# Altium PCB PCB4.PcbDoc
Units mm, origin at the board's own origin, x right, y up, seen from the top; angles counter-clockwise.
Board outline 130 x 65 mm, 2 copper layers (Top Layer, Bottom Layer), stack 1.58 mm thick; 40 components, 33 nets, 174 pads, 17 vias.
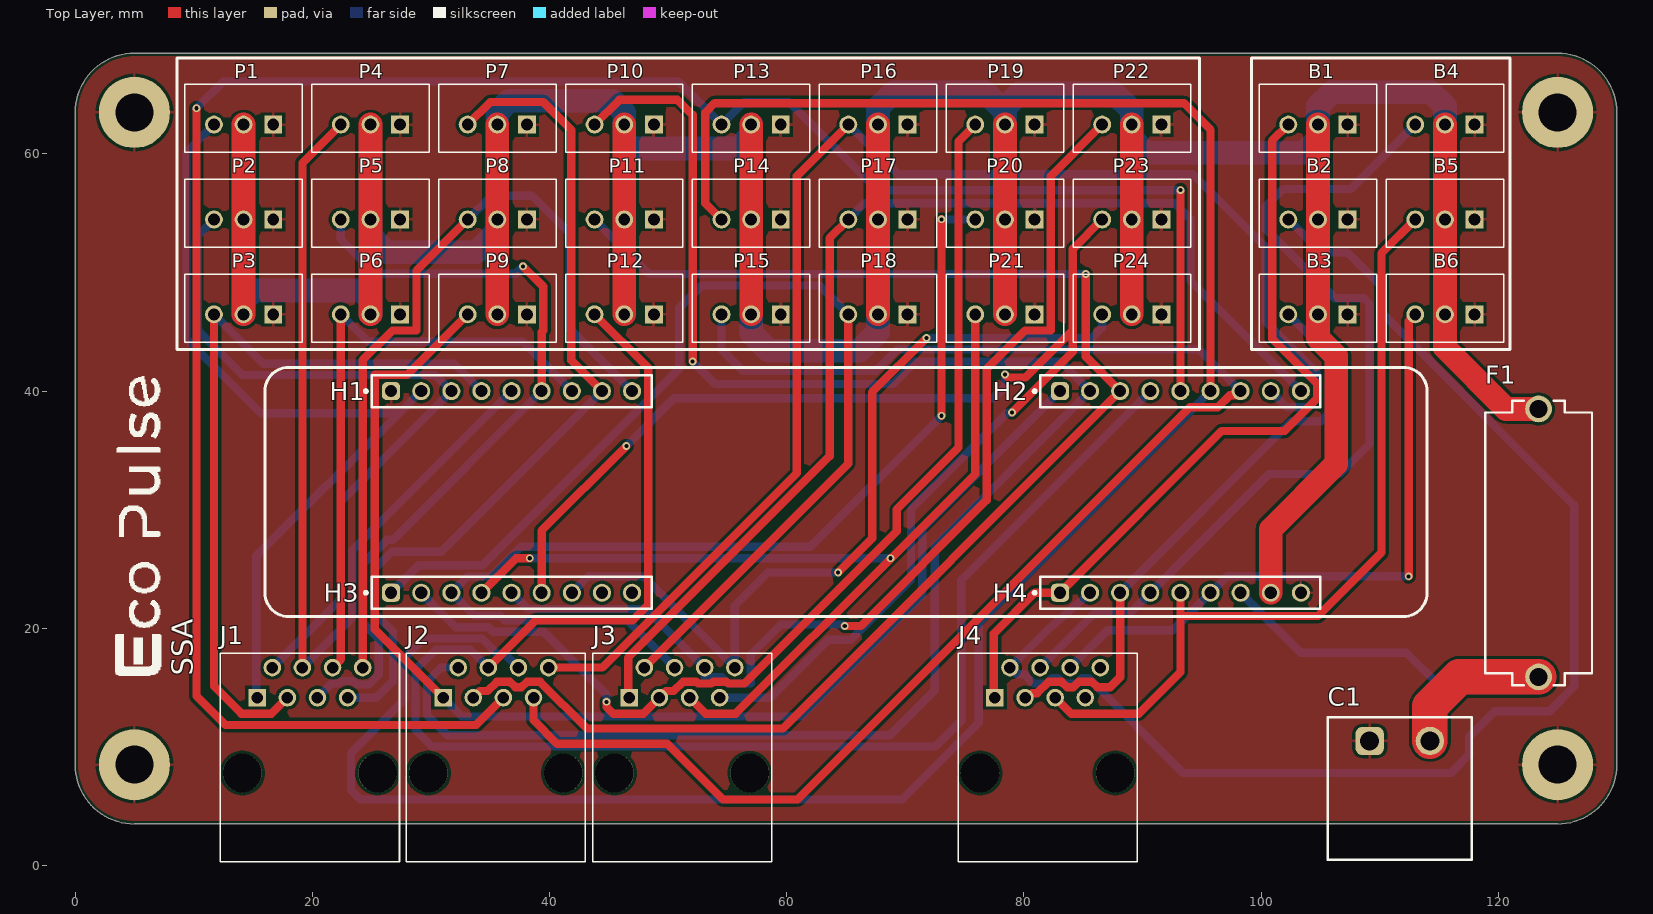
[diagram p0: Top Layer view]
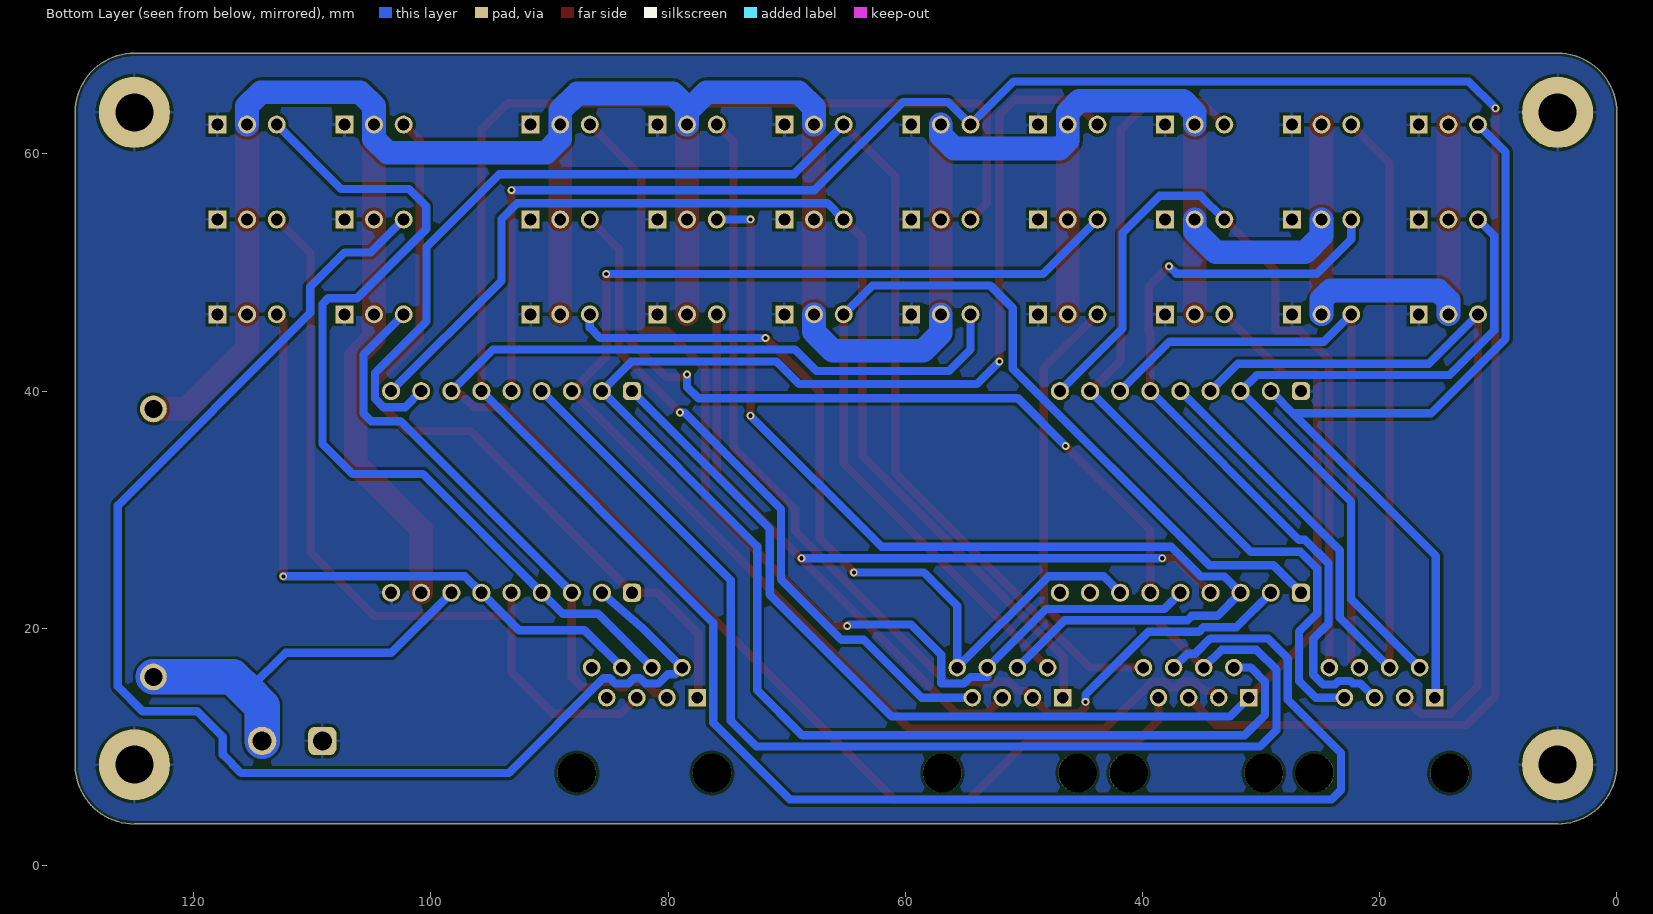
[diagram p1: Bottom Layer view, seen from below]
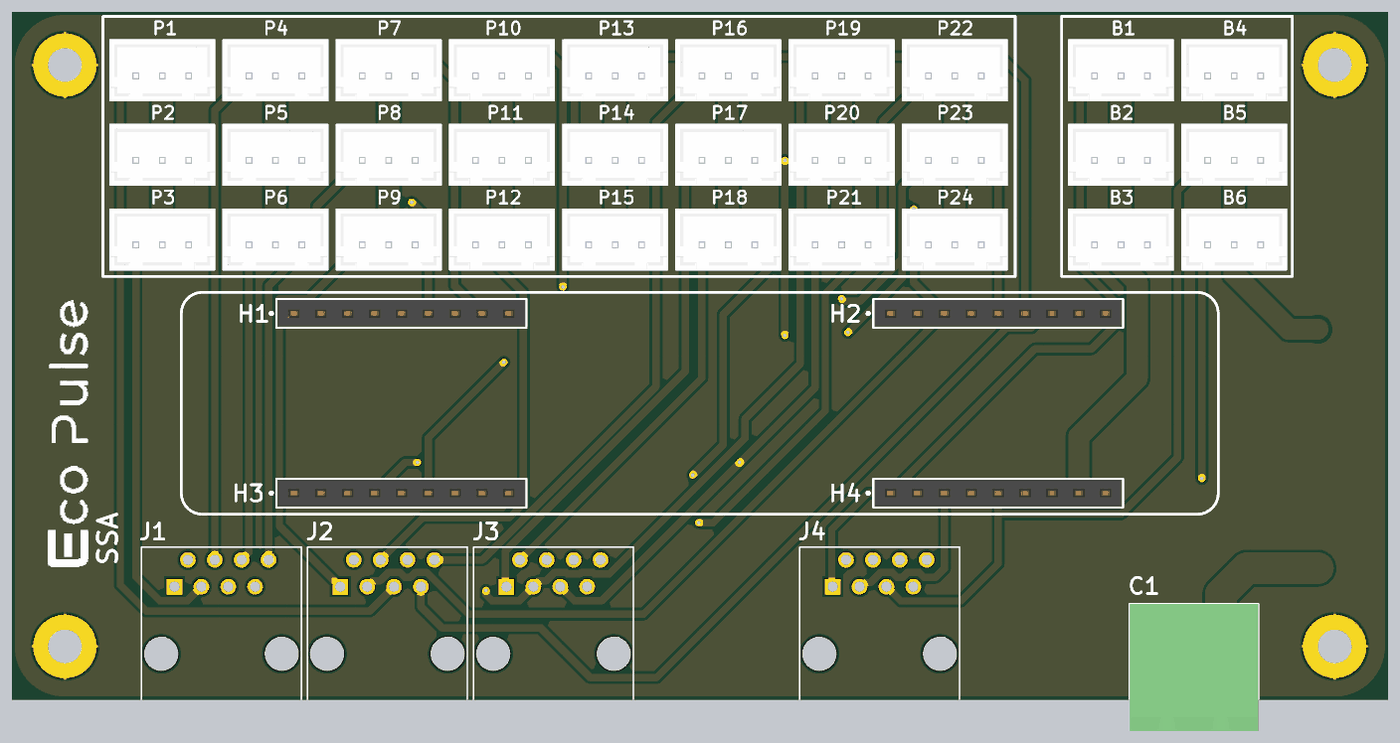
[diagram p2: 3D render of the assembled board from above, using the file's embedded part models]

## Layer stack, top to bottom
Top Solder: solder mask 0.0102, Solder Resist, Dk 3.5
Top Layer: signal copper 0.0356
Dielectric 1: dielectric 1.5086, FR-4, Dk 4.8
Bottom Layer: signal copper 0.0356
Bottom Solder: solder mask 0.0102, Solder Resist, Dk 3.5

## Board outline
5,3.5 cw(c5,8.5) 0,8.5 0,63.5 cw(c5,63.5) 5,68.5 125,68.5 cw(c125,63.5) 130,63.5 130,8.5 cw(c125,8.5) 125,3.5

## Design rules (kind name [scope] priority, off if disabled: settings)
BoardOutlineClearance [All] p1: gap=0.254 ignorepadtopadclearanceinfootprint=FALSE except(0: Arc-SplitContinuation Track-SplitContinuation SMDPad-SplitContinuation THPad-SplitContinuation Via-SplitContinuation Fill-SplitContinuation Poly-SplitContinuation Region-SplitContinuation Text-SplitContinuation)
Clearance [All] p1: gap=0.254 ignorepadtopadclearanceinfootprint=FALSE
ComponentClearance [All] p1: gap=0.01 collisioncheckmode=3 verticalgap=0.01 showdistances=FALSE
HoleSize [All] p1: absolutevalues=TRUE maxlimit=4 minlimit=0.025 maxpercent=80.000 minpercent=20.000
PolygonConnect [All] p1: connectstyle=Relief reliefconductorwidth=0.254 reliefentries=4 polygonreliefangle="90 Angle" airgapwidth=0.254
RoutingLayers RoutingLayers_1 [InNet('GND')] p1: top layer_v5=FALSE bottom layer_v5=FALSE
RoutingLayers [All] p2: top layer_v5=TRUE bottom layer_v5=TRUE
RoutingVias [All] p1: holewidth=0.35 width=0.65 viastyle="Through Hole" minholewidth=0.31 minwidth=0.55 maxholewidth=0.4 maxwidth=0.7
SilkToSilkClearance [All] p1: silktosilkclearance=0.01
SilkToSolderMaskClearance [IsPad] p1: minsilkscreentomaskgap=0.1 clearancetoexposedcopper=TRUE
SolderMaskExpansion [All] p1: expansion=0.102 istentingtop=FALSE
SupplyNets "Schematic Supply Nets_1" [InNet('VCC')] p1: voltage=0.000
SupplyNets "Schematic Supply Nets" [InNet('GND')] p2: voltage=0.000
Width Width_1 [InNet('VCC')] p1: maxlimit=3 minlimit=1.5 preferedwidth=2 minimp=50.000000 maximp=50.000000 favimp=50.000000
Width [All] p2: maxlimit=3 minlimit=0.5 preferedwidth=0.7 minimp=50.000000 maximp=50.000000 favimp=50.000000
25 further rules are at their usual default settings.

## Classes and differential pairs
component class Sheet3: C1 F1 H1 H2 H3 H4
component class Sheet2: B1 B2 B3 B4 B5 B6 J1 J2 J3 J4 P1 P2 P3 P4 P5 P6 P7 P8 P9 P10 P11 P12 P13 P14 P15 P16 P17 P18 P19 P20 P21 P22 P23 P24

## Components (designator, comment, footprint, x,y, rotation, side; value= is the part's Value field where it differs from the comment)
B1 "B3B-XH-A" JST_B3B-XH-A 104.8,63 r0 top
B2 "B3B-XH-A" JST_B3B-XH-A 104.8,55 r0 top
B3 "B3B-XH-A" JST_B3B-XH-A 104.8,47 r0 top
B4 "B3B-XH-A" JST_B3B-XH-A 115.5,63 r0 top
B5 "B3B-XH-A" JST_B3B-XH-A 115.5,55 r0 top
B6 "B3B-XH-A" JST_B3B-XH-A 115.5,47 r0 top
C1 "691313510002" 691313510002 111.7,6.5 r0 top
F1 "696101000002" 696101000002 -1146.6,1297.2 r90 top
H1 "61300911821" 61300911821 36.8,40 r0 top
H2 "61300911821" 61300911821 93.2,40 r0 top
H3 "61300911821" 61300911821 36.8,23 r0 top
H4 "61300911821" 61300911821 93.2,23 r0 top
J1 "SS-7188-NF-K1" BEL_SS-7188-NF-K1 19.8,7.8 r0 top
J2 "SS-7188-NF-K1" BEL_SS-7188-NF-K1 35.475,7.8 r0 top
J3 "SS-7188-NF-K1" BEL_SS-7188-NF-K1 51.175,7.8 r0 top
J4 "SS-7188-NF-K1" BEL_SS-7188-NF-K1 82,7.8 r0 top
P1 "B3B-XH-A" JST_B3B-XH-A 14.2,63 r0 top
P2 "B3B-XH-A" JST_B3B-XH-A 14.2,55 r0 top
P3 "B3B-XH-A" JST_B3B-XH-A 14.2,47 r0 top
P4 "B3B-XH-A" JST_B3B-XH-A 24.9,63 r0 top
P5 "B3B-XH-A" JST_B3B-XH-A 24.9,55 r0 top
P6 "B3B-XH-A" JST_B3B-XH-A 24.9,47 r0 top
P7 "B3B-XH-A" JST_B3B-XH-A 35.6,63 r0 top
P8 "B3B-XH-A" JST_B3B-XH-A 35.6,55 r0 top
P9 "B3B-XH-A" JST_B3B-XH-A 35.6,47 r0 top
P10 "B3B-XH-A" JST_B3B-XH-A 46.3,63 r0 top
P11 "B3B-XH-A" JST_B3B-XH-A 46.3,55 r0 top
P12 "B3B-XH-A" JST_B3B-XH-A 46.3,47 r0 top
P13 "B3B-XH-A" JST_B3B-XH-A 57,63 r0 top
P14 "B3B-XH-A" JST_B3B-XH-A 57,55 r0 top
P15 "B3B-XH-A" JST_B3B-XH-A 57,47 r0 top
P16 "B3B-XH-A" JST_B3B-XH-A 67.7,63 r0 top
P17 "B3B-XH-A" JST_B3B-XH-A 67.7,55 r0 top
P18 "B3B-XH-A" JST_B3B-XH-A 67.7,47 r0 top
P19 "B3B-XH-A" JST_B3B-XH-A 78.4,63 r0 top
P20 "B3B-XH-A" JST_B3B-XH-A 78.4,55 r0 top
P21 "B3B-XH-A" JST_B3B-XH-A 78.4,47 r0 top
P22 "B3B-XH-A" JST_B3B-XH-A 89.1,63 r0 top
P23 "B3B-XH-A" JST_B3B-XH-A 89.1,55 r0 top
P24 "B3B-XH-A" JST_B3B-XH-A 89.1,47 r0 top

## Footprints (in the part's own frame and the unit in brackets; to place one, negate y for a bottom-side part, rotate by r counter-clockwise, add the part's x,y. Pads: shape width x height; smd on the part's side, far side on the other; paste and mask are expansions set on the pad)
61300911821 [mm] "Socket Header, Pitch 2.54 mm, THT, Vertical, single row, 9p"
  rrect50% 1.52x1.52 hole 1.02: 1(-10.16,0)
  round 1.52 hole 1.02: 2(-7.62,0) 3(-5.08,0) 4(-2.54,0) 5(0,0) 6(2.54,0) 7(5.08,0) 8(7.62,0) 9(10.16,0)
  silkscreen extent -12.41,-1.35 11.8,1.35, body extent -11.68,-1.25 11.68,1.25, height 8.55
691313510002 [mm] "5,08mm - PCB Headers - Horizontal - Closed ends - 02p"
  rrect50% 2.4x2.4 hole 1.6: 1(-2.54,4)
  round 2.4 hole 1.6: 2(2.54,4)
  silkscreen extent -6.08,-6 6.08,6, body extent -6.08,-6 6.08,6, height 8.55
696101000002 [mm] "FUSEHOLDER BLOCKS - PCB - CLIP COVER - THT"
  round 2.25 hole 1.5: 1(-1281.3,-1270) 2(-1258.7,-1270)
  silkscreen extent -1282,-1274.5 -1258,-1265.5, body extent -1282,-1274.5 -1258,-1265.5, height 13.55
BEL_SS-7188-NF-K1 [mm]
  rect 1.478x1.478 hole 0.97: 1(-4.445,6.35)
  round 1.478 hole 0.97: 2(-3.175,8.89) 3(-1.905,6.35) 4(-0.635,8.89) 5(0.635,6.35) 6(1.905,8.89) 7(3.175,6.35) 8(4.445,8.89)
  round 3.25 hole 3.25 unplated: ""(-5.7,0) ""(5.7,0)
  silkscreen extent -7.55,-7.5 7.55,10.1
JST_B3B-XH-A [mm]
  rect 1.508x1.508 / inner round 1.508 / far side rect 1.508x1.508 hole 1: 1(2.5,-0.525)
  round 1.508 hole 1: 2(0,-0.525) 3(-2.5,-0.525)
  silkscreen extent -4.95,-2.88 4.95,2.88, body extent -4.95,-2.88 4.95,2.88, height 7

## Part data
B1 B2 B3 B4 B5 B6 P1 P2 P3 P4 P5 P6 P7 P8 P9 P10 P11 P12 P13 P14 P15 P16 P17 P18 P19 P20 P21 P22 P23 P24: "Connector Header Through Hole 3 position 0.098 (2.50mm)", Package=None, Check_prices=https://www.snapeda.com/parts/B3B-XH-A/JST+Sales+America+Inc./view-part/?ref=eda, MF="JST Sales", MP=B3B-XH-A, SnapEDA_Link=https://www.snapeda.com/parts/B3B-XH-A/JST+Sales+America+Inc./view-part/?ref=snap
C1: library part CMP-1502-02192-3, "313; 5.08MM Pitch Straight Pluggable Term Block, Pcb Header, Through Hole, 2 Way", Color=Green, Current=20A, Max Operating Temperature=105°C, Min Operating Temperature=-40°C, Voltage=300V, Contact Material=Tin, Contact Plating=Tin, Current Rating=20A, Gender=Male, Height=8.7mm, Lead Pitch=5.08mm, Length=11.5mm, Mount="Through Hole", Number of Contacts=2, Number of Levels=1, Number of Pins=2, Number of Positions Per Level=2, Number of Rows=1, Packaging=Box, Pitch=5.08mm, RoHS=Compliant, Termination=Solder, Voltage Rating=300V, Width=12.16mm
F1: library part CMP-1502-00233-4, "WR-FSH Fuse Holder Blocks Fuse Holder Blocks Clip Cover for PCB", Fuse Current=10A, Max Operating Temperature=120°C, Min Operating Temperature=-30°C, Voltage Rating (AC)=250V, Height=13.6mm, Mount="Through Hole", Packaging=Box, REACH SVHC=Unknown, RoHS=Compliant
H1 H2 H3 H4: library part CMP-1502-01331-4, "THT Vertical Socket Header WR-PHD, Pitch 2.54 mm, Single Row, 9 pins", Contact Resistance=20mΩ, Current Rating=3A, Operating Supply Voltage=250V, Gender=Female, Lead Pitch=2.54mm, Number of Pins=9, Orientation=Vertical
J1 J2 J3 J4: "Conn Modular Jack F 8 POS 2.54mm Solder RA Thru-Hole 8 Terminal 1 Port Cat 5", Package=None, Availability=Unavailable, MP=SS-7188-NF-K1, Price=None

## Free pads (board coordinates)
  round 6 hole 3.2: 2(5,8.5) 2(5,63.5) 2(125,8.5) 2(125,63.5)

## Via types
v1: diameter 0.65, hole 0.35, Top Layer to Bottom Layer, 17 vias

## Nets (pads, with @x,y where several pads share a name; then routed paths per layer and width w, separated by ;. In a path a pad name is that pad's centre, name@x,y a point inside that pad or via, vN(x,y) a via of type N, cw(c..) or ccw(c..) an arc to the next point about the centre after c; other vN are vias at no path point)
GND: B1.1 B2.1 B3.1 B4.1 B5.1 B6.1 C1.1 H1.1 H4.9 P1.1 P2.1 P3.1 P4.1 P5.1 P6.1 P7.1 P8.1 P9.1 P10.1 P11.1 P12.1 P13.1 P14.1 P15.1 P16.1 P17.1 P18.1 P19.1 P20.1 P21.1 P22.1 P23.1 P24.1 pad.2
NetB1_3: B1.3 H4.1 J4.1 | length 66.1
  Top Layer w0.7: J4.1 77.47,14.235 77.47,19.562 80.908,23 H4.1 96.68,36.64 101.994,36.64 104.724,39.37 104.724,40.64 100.94,44.424 100.94,61.115 B1.3
NetB2_3: B2.3 H4.2 J4.2 | length 115.8
  Bottom Layer w0.7: H4.2 82.117,19.982 J4.2 79.386,16.129 80.027,16.129 80.809,15.347 81.921,15.347 82.374,15.8 82.896,15.8 83.349,15.347 84.461,15.347 84.914,15.8 85.436,15.8 93.436,7.8 116,7.8 117.55,9.35 117.55,10.85 119.7,13 124.3,13 126.4,15.1 126.4,30.375 110.182,46.593 110.182,48.787 107.273,51.695 105.08,51.695 B2.3
NetB3_3: B3.3 H4.3 J4.3 | length 50.2
  Top Layer w0.7: J4.3 80.306,14.15 80.693,14.537 81.123,14.537 82.079,15.493 83.191,15.493 83.644,15.04 84.166,15.04 84.619,15.493 85.731,15.493 86.187,15.037 87.282,15.037 88.12,15.875 H4.3
  Bottom Layer w0.7: H4.3 102.585,37.465 105.054,37.465 105.689,38.1 105.689,43.086 B3.3
NetB4_3: B4.3 H4.4 J4.4 | length 76.1
  Bottom Layer w0.7: J4.4 85.909,21.234 88.894,21.234 H4.4 100.68,33.02 106.604,33.02 109.144,35.56 109.144,47.35 108.661,47.833 106.218,47.833 100.4,53.651 100.4,55.6 101.848,57.048 107.573,57.048 B4.3
NetB5_3: B5.3 H4.5 J4.5 | length 67.7
  Top Layer w0.7: J4.5 83.983,12.802 89.687,12.802 93.2,16.314 93.2,21.031 ; H4.5 93.2,21.031 ; B5.3 110.16,51.635 110.16,26.391 104.8,21.031 93.2,21.031
NetB6_3: B6.3 H4.6 J4.6 | length 54
  Top Layer w0.7: v1(112.446,24.384) 112.446,45.921 B6.3
  Bottom Layer w0.7: J4.6 87.052,19.837 92.577,19.837 H4.6 97.124,24.384 v1(112.446,24.384)
NetC1_2: C1.2 F1.1 H4.7 | length 46.5
  Top Layer w3: C1.2 114.24,13.44 116.7,15.9 F1.1
  Bottom Layer w0.7: H4.7 103.348,17.932 112.268,17.932 115.2,15
  Bottom Layer w3: C1.2 114.24,13.44 115.5,14.7 116.7,15.9 F1.1
NetH1_2: H1.2 J1.1 P1.3 | length 71.2
  Bottom Layer w0.7: P1.3 9.388,60.163 9.388,44.412 15.675,38.125 27.305,38.125 ; J1.1 15.265,14.15 15.265,26.085 27.305,38.125 ; H1.2 27.305,38.125
NetH1_3: H1.3 J1.2 P2.3 | length 63
  Bottom Layer w0.7: P2.3 10.342,53.117 10.342,45.117 14.095,41.364 30.356,41.364 H1.3 22.411,30.691 22.411,22.476 J1.2
NetH1_4: H1.4 J1.3 P3.3 | length 64.3
  Top Layer w0.7: P3.3 11.7,15.119 14.012,12.807 16.552,12.807 J1.3
  Bottom Layer w0.7: P3.3 15.857,42.318 31.942,42.318 H1.4
NetH1_5: H1.5 J1.4 P4.3 | length 77.7
  Top Layer w0.7: J1.4 19.165,59.24 P4.3
  Bottom Layer w0.7: J1.4 23.365,20.89 23.365,26.565 H1.5
NetH1_6: H1.6 J1.5 P5.3 | length 67
  Top Layer w0.7: v1(37.77,50.521) 39.472,48.819 39.472,45.11 39.34,44.979 H1.6
  Bottom Layer w0.7: J1.5 21.627,15.342 22.256,15.342 22.479,15.565 23.459,15.565 23.759,15.265 24.765,15.265 25.603,16.104 25.603,19.101 24.319,20.385 24.319,25.487 26.289,27.457 26.797,27.457 H1.6 ; P5.3 22.4,52.8 25.3,49.9 37.149,49.9 v1(37.77,50.521)
NetH1_7: H1.7 J1.6 P6.3 | length 52.2
  Top Layer w0.7: J1.6 22.4,17.385 P6.3
  Bottom Layer w0.7: P6.3 24.704,44.171 37.709,44.171 H1.7
NetH1_8: H1.8 J1.7 P7.3 | length 73.5
  Top Layer w0.7: P7.3 35.014,64.389 39.472,64.389 41.834,62.027 41.834,42.586 H1.8
  Bottom Layer w0.7: J1.7 25.4,14.15 26.794,15.544 26.794,19.739 25.273,21.26 25.273,25.048 26.67,26.445 30.865,26.445 H1.8
NetH1_9: H1.9 J1.8 P8.3 | length 68.9
  Top Layer w0.7: J1.8 24.245,42.609 26.753,45.117 28.778,45.117 28.778,50.153 P8.3
  Bottom Layer w0.7: P8.3 35.089,56.464 38.557,56.464 41.681,53.34 41.681,45.279 H1.9
NetH2_1: H2.1 J2.1 P9.3 | length 106.8
  Top Layer w0.7: J2.1 25.273,19.907 25.273,41.377 28.002,41.377 P9.3
  Bottom Layer w0.7: J2.1 32.607,12.573 61.145,12.573 71.439,22.867 71.439,28.399 H2.1
NetH2_2: H2.2 J2.2 P10.3 | length 148.2
  Top Layer w0.7: P10.3 45.892,64.567 50.8,64.567 52.07,63.297 v1(52.07,42.494)
  Bottom Layer w0.7: J2.2 30.863,16.69 29.667,15.494 29.667,12.7 31.384,10.983 68.692,10.983 72.492,14.783 72.492,26.912 H2.2 83.086,42.494 70.86,42.494 68.966,40.6 53.964,40.6 v1(52.07,42.494)
NetH2_3: H2.3 J2.3 P11.3 | length 123.3
  Top Layer w0.7: J2.3 34.127,14.707 34.767,14.707 35.554,15.493 36.666,15.493 37.119,15.04 37.641,15.04 38.094,15.493 39.206,15.493 43.142,11.557 59.677,11.557 H2.3 85.217,42.903 v1(85.217,49.886)
  Bottom Layer w0.7: P11.3 48.389,49.886 v1(85.217,49.886)
NetH2_4: H2.4 J2.4 P12.3 | length 136.5
  Top Layer w0.7: J2.4 38.829,20.679 46.99,20.679 48.336,22.025 48.336,41.939 P12.3
  Bottom Layer w0.7: J2.4 33.344,18.186 30.378,18.186 28.702,16.51 28.702,11.43 30.103,10.029 72.538,10.029 74.727,12.217 74.727,24.067 H2.4
NetH2_5: H2.5 J2.5 P13.3 | length 183.6
  Top Layer w0.7: v1(10.236,63.856) 10.236,14.29 12.673,11.853 33.813,11.853 J2.5 ; H2.5 v1(93.2,56.947)
  Bottom Layer w0.7: v1(10.236,63.856) 12.497,66.116 50.859,66.116 P13.3 56.414,64.389 60.198,64.389 67.64,56.947 v1(93.2,56.947)
NetH2_6: H2.6 J2.6 P14.3 | length 191.8
  Top Layer w0.7: P14.3 53.137,55.838 53.137,63.5 53.924,64.287 93.497,64.287 95.74,62.045 H2.6
  Bottom Layer w0.7: J2.6 36.214,17.856 35.574,17.856 34.29,19.14 29.413,19.14 27.748,17.475 27.748,13.97 23.266,9.488 23.266,6.35 24.054,5.563 69.723,5.563 76.2,12.04 76.2,20.46 H2.6
NetH2_7: H2.7 J2.7 P15.3 | length 128.3
  Top Layer w0.7: J2.7 38.65,12.252 40.64,10.262 49.936,10.262 54.635,5.563 60.909,5.563 93.98,38.633 96.342,38.633 97.358,39.649 97.929,39.649 H2.7
  Bottom Layer w0.7: P15.3 54.5,43.5 56.3,41.7 67.506,41.7 69.317,43.51 94.77,43.51 H2.7
NetH2_8: H2.8 J2.8 P16.3 | length 117.7
  Top Layer w0.7: J2.8 44.452,16.69 60.858,33.096 60.858,58.133 P16.3
  Bottom Layer w0.7: P16.3 69.375,58.3 94.227,58.3 100.381,52.146 100.381,45.866 104.724,41.522 104.724,39.37 103.988,38.633 102.187,38.633 H2.8
NetH2_9: H2.9 J3.1 P17.3 | length 96.5
  Top Layer w0.7: J3.1 46.634,14.15 46.634,17.523 63.627,34.516 63.627,52.902 P17.3
  Bottom Layer w0.7: P17.3 66.58,55.855 92.71,55.855 94.056,54.508 94.056,49.304 H2.9
NetH3_1: H3.1 J3.2 P18.3 | length 90.2
  Top Layer w0.7: J3.2 65.2,33.89 P18.3
  Bottom Layer w0.7: H3.1 28.958,25.318 34.36,25.318 50.927,41.885 50.927,46.99 52.837,48.9 62.775,48.9 P18.3
NetH3_2: H3.2 J3.3 P19.3 | length 88.6
  Top Layer w0.7: v1(44.8,13.8) 44.8,13.371 45.364,12.807 47.927,12.807 J3.3 49.827,14.707 50.467,14.707 51.254,15.493 52.378,15.493 52.524,15.347 53.648,15.347 53.794,15.493 54.918,15.493 55.064,15.347 56.447,15.347 69.274,28.174 69.274,30.023 74.491,35.24 74.491,61.066 P19.3
  Bottom Layer w0.7: H3.2 32.086,20.094 34.868,20.094 35.252,19.71 39.497,19.71 44.8,14.407 v1(44.8,13.8)
NetH3_3: H3.3 J3.4 P20.3 | length 88.4
  Top Layer w0.7: v1(73.05,37.922) v1(73.05,54.483)
  Bottom Layer w0.7: J3.4 46.548,20.682 36.206,20.682 35.839,21.048 33.672,21.048 H3.3 33.084,24.364 35.067,24.364 37.585,26.882 62.011,26.882 v1(73.05,37.922) ; v1(73.05,54.483) 73.058,54.475 P20.3
NetH3_4: H3.4 J3.5 P21.3 | length 82.2
  Top Layer w0.7: H3.4 37.168,25.908 v1(38.327,25.908) ; J3.5 53.153,12.807 55.702,12.807 v1@68.781,25.885 ; v1(68.758,25.908) v1@68.781,25.885 ; P21.3 75.9,33.005 v1@68.781,25.885
  Bottom Layer w0.7: v1(38.327,25.908) v1(68.758,25.908)
NetH3_5: H3.5 J3.6 P22.3 | length 88.6
  Top Layer w0.7: v1(64.9,20.2) 66.25,20.2 76.86,30.81 76.86,41.866 80.112,45.117 82.271,45.117 82.271,58.146 P22.3
  Bottom Layer w0.7: H3.5 38.164,21.636 48.134,21.636 J3.6 53.08,15.9 54.51,15.9 55.069,15.342 56.972,15.342 56.972,17.78 59.512,20.32 64.78,20.32 v1(64.9,20.2)
NetH3_6: H3.6 J3.7 P23.3 | length 115.4
  Top Layer w0.7: H3.6 39.34,28.24 v1(46.482,35.382) ; v1(78.4,41.4) 78.652,41.148 80.116,41.148 84.13,45.162 ; v1(79,38.2) 84.13,43.33 84.13,45.162 ; P23.3 84.13,52.005 84.13,45.162
  Bottom Layer w0.7: v1(46.482,35.382) 50.5,39.4 77.449,39.4 78.4,40.351 v1(78.4,41.4) ; J3.7 58.625,14.15 63.5,19.025 65.38,19.025 70.485,24.13 70.485,30.048 78.637,38.2 v1(79,38.2)
NetH3_7: H3.7 J3.8 P24.3 | length 71.8
  Top Layer w0.7: v1(64.338,24.714) 67.212,27.588 67.212,39.907 v1(71.78,44.475)
  Bottom Layer w0.7: H3.7 43.264,24.384 47.926,24.384 J3.8 55.62,21.914 58.42,24.714 v1(64.338,24.714) ; v1(71.78,44.475) 85.725,44.475 86.6,45.35 P24.3
VCC: B1.2 B2.2 B3.2 B4.2 B5.2 B6.2 F1.2 H4.8 P1.2 P2.2 P3.2 P4.2 P5.2 P6.2 P7.2 P8.2 P9.2 P10.2 P11.2 P12.2 P13.2 P14.2 P15.2 P16.2 P17.2 P18.2 P19.2 P20.2 P21.2 P22.2 P23.2 P24.2 | length 331.2
  Top Layer w2: P3.2 P2.2 P1.2 ; P6.2 P5.2 P4.2 ; P9.2 P8.2 35.6,58.471 ; 35.6,58.471 P7.2 ; P12.2 P11.2 P10.2 ; P15.2 57,50.47 P14.2 P13.2 ; P18.2 P17.2 P16.2 ; P21.2 P20.2 P19.2 ; P24.2 P23.2 P22.2 ; H4.8 100.82,28.354 106.328,33.862 106.328,42.968 104.8,44.496 B3.2 B2.2 B1.2 ; B4.2 B5.2 B6.2 115.5,43.656 120.656,38.5 F1.2
  Bottom Layer w2: P3.2 14.2,47.625 15.064,48.489 24.13,48.489 24.9,47.719 P6.2 ; P5.2 24.9,53.1 26.3,51.7 33.8,51.7 35.6,53.5 P8.2 ; P7.2 35.6,63.5 36.591,64.491 45.309,64.491 46.3,63.5 P10.2 46.3,61.142 46.99,60.452 55.88,60.452 57,61.572 P13.2 ; P15.2 57,44.9 58.5,43.4 66.1,43.4 67.7,45 P18.2 ; P16.2 67.7,63.9 69,65.2 76.761,65.2 78.4,63.561 78.4,63.516 P19.2 ; 78.23,63.73 79.6,65.1 87.656,65.1 89.1,63.656 89.1,61.3 90.3,60.1 103.628,60.1 104.8,61.272 104.8,64.028 105.972,65.2 114.328,65.2 115.5,64.028 B4.2
pads on no net: H3.8 H3.9 J1. J2. J3. J4. J4.7 J4.8

## Polygon pours and split planes (outlines as drawn)
GND on Bottom Layer "GND_L02_P001" (solid, pour order 1): 0,69.7 0.3,70 131.4,70 131.4,0.1 131.3,0 130.6,0.7 0,0.7
GND on Top Layer "GND_L01_P000" (solid, pour order 0): 0,69.1 0.2,69.3 130.7,69.3 130.7,1.9 130.1,1.3 128.4,3 0,3 0,2.9

## Silkscreen, mask and mechanical layers (free items; w line width, h text height)
Top Overlay:
  drawing of 25 lines, arcs and shapes, not listed
  text "SSA" at 9.9,16 h1.8 r90
Mechanical 1:
  the board outline again, w0.254